# Altium PCB YarnControl_Driver_v1.1.PcbDoc
Units mm, origin at the board's own origin, x right, y up, seen from the top; angles counter-clockwise.
Board outline 80 x 60 mm, 2 copper layers (Top Layer, Bottom Layer); 133 components, 96 nets, 439 pads, 185 vias.
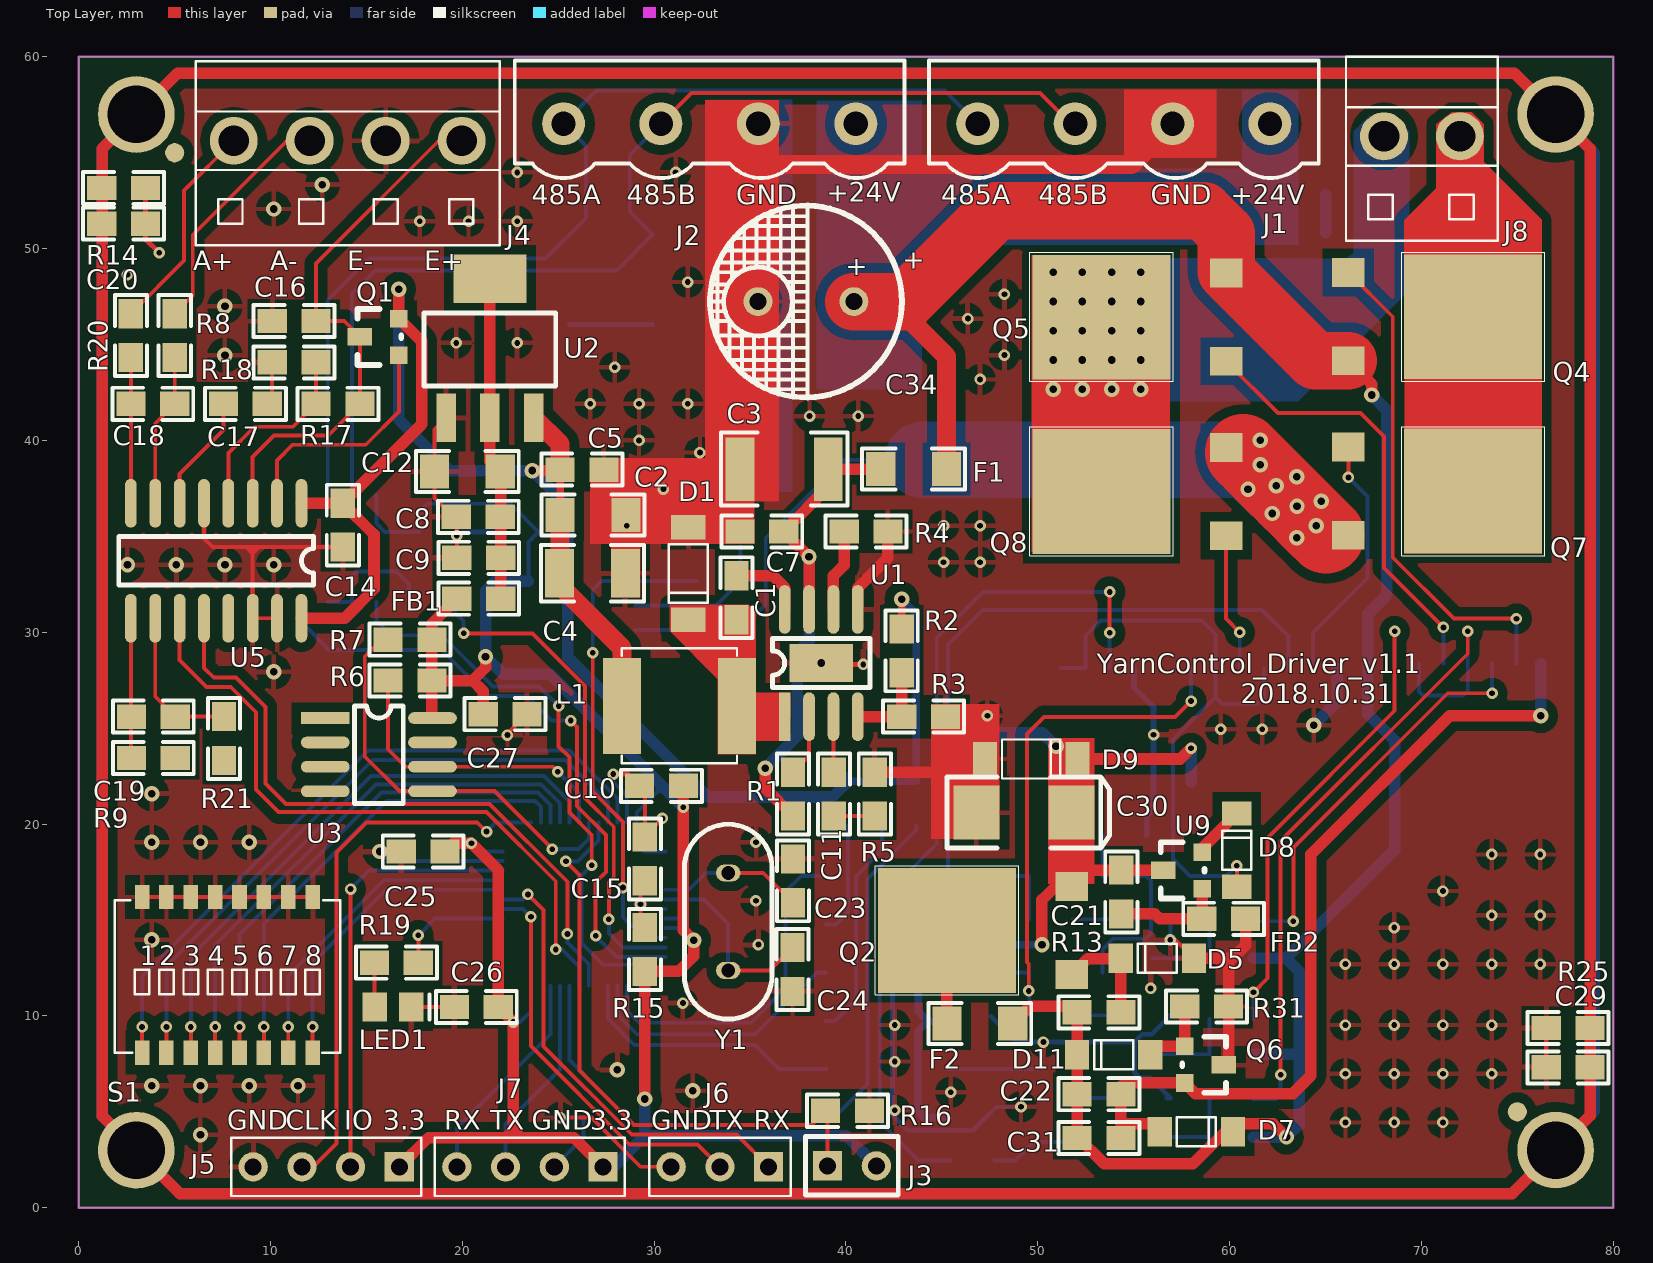
[diagram p0: Top Layer view]
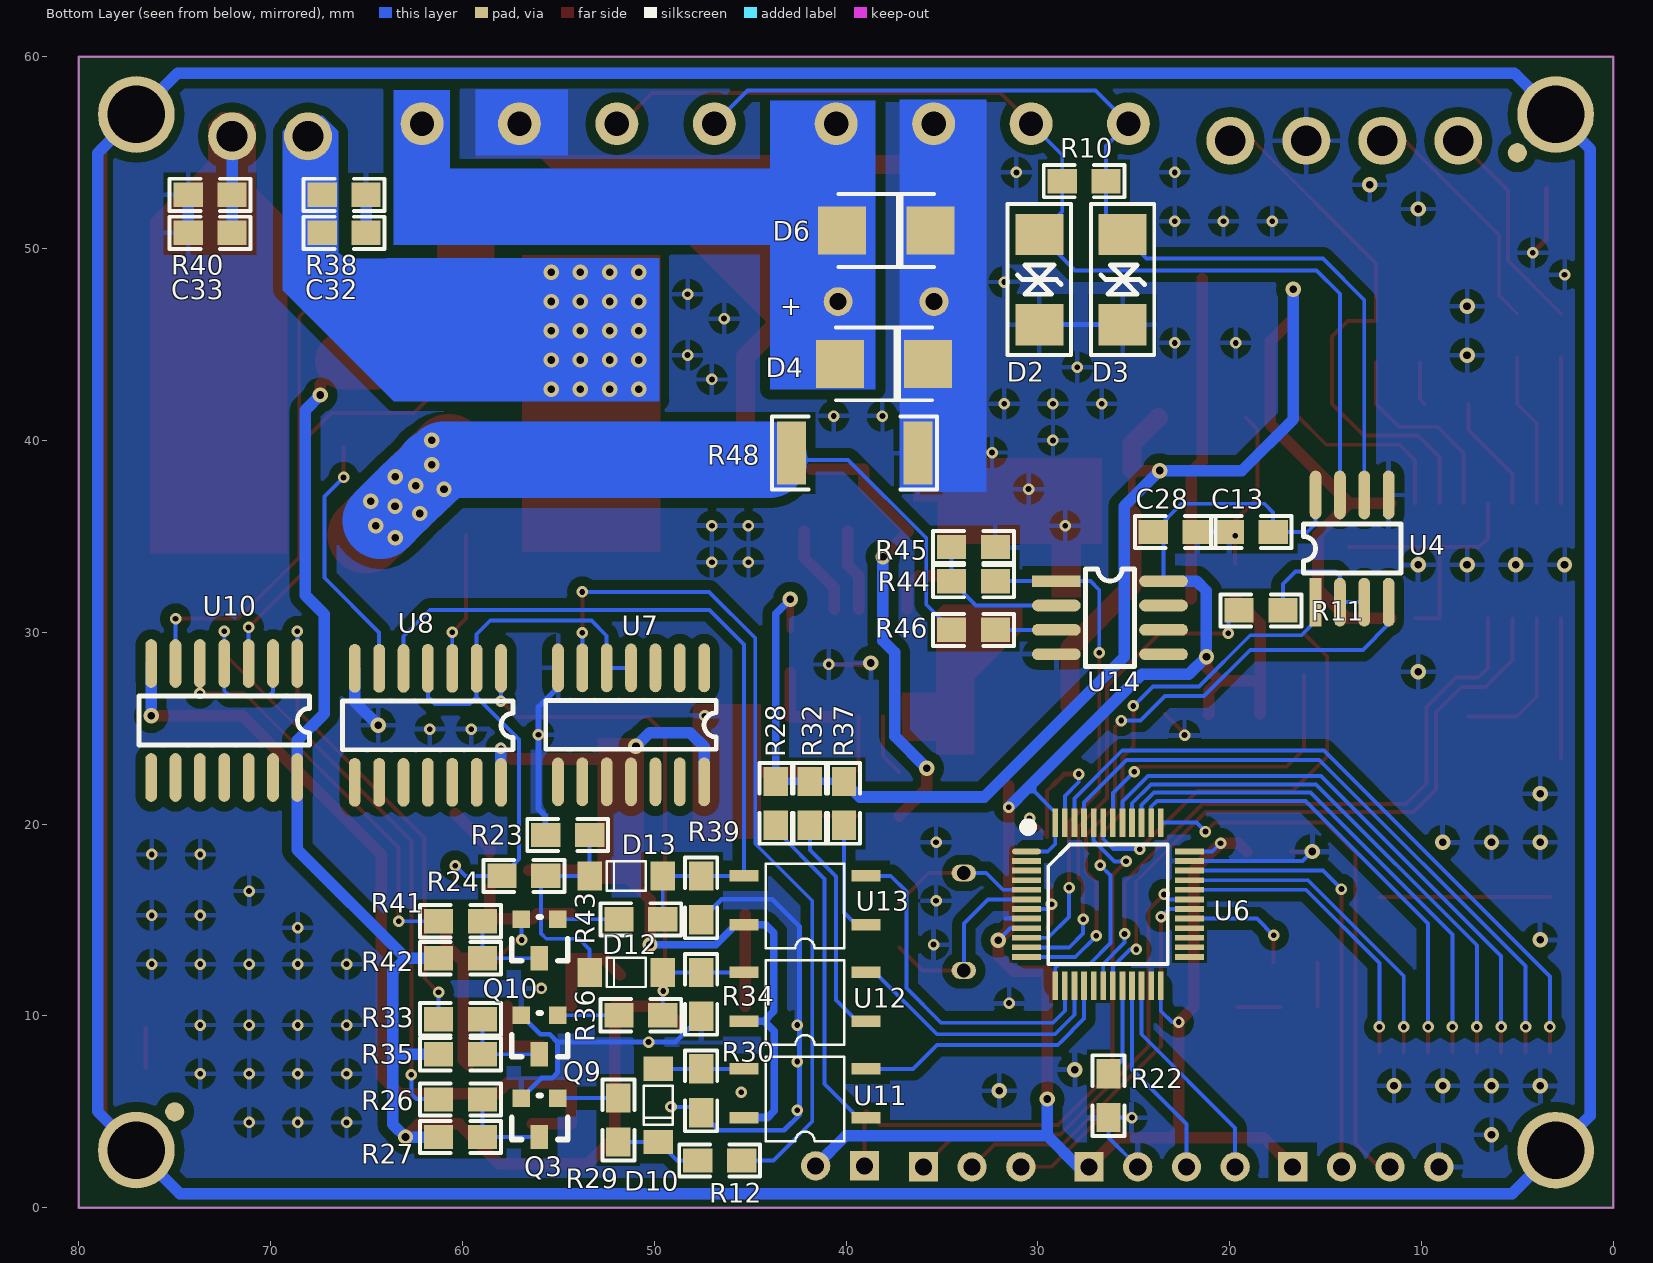
[diagram p1: Bottom Layer view, seen from below]
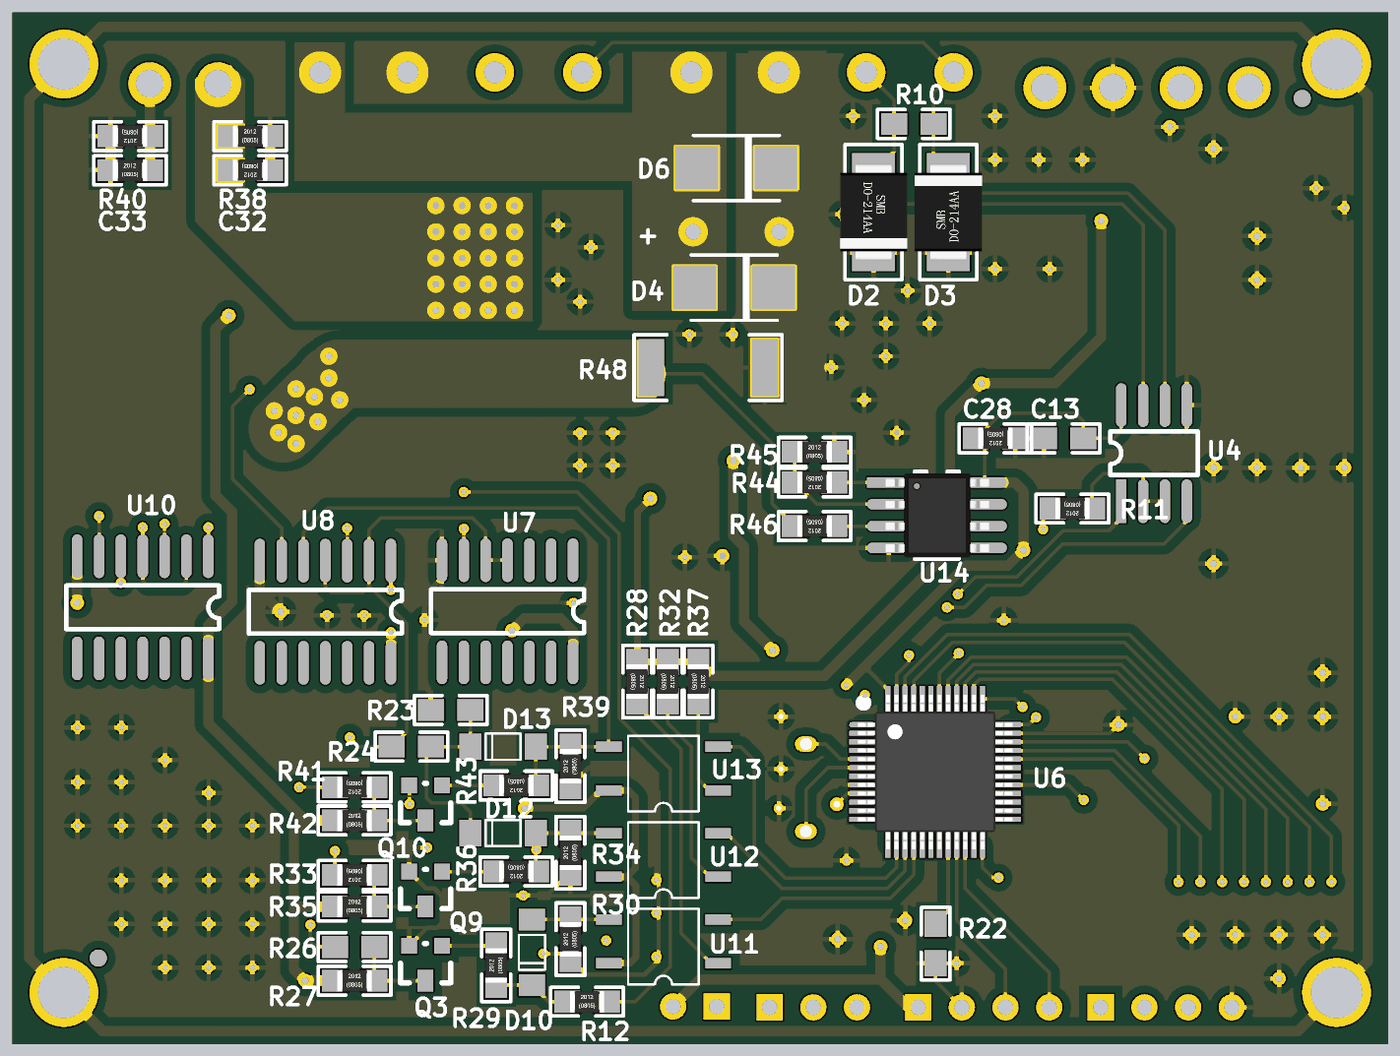
[diagram p2: 3D render of the assembled board from below, using the file's embedded part models]

## Layer stack, top to bottom
Top Layer: signal copper 0.0356
Dielectric: dielectric 0.32, FR-4, Dk 4.8
Bottom Layer: signal copper 0.0356

## Board outline
0,0 80,0 80,60 0,60

## Design rules (kind name [scope] priority, off if disabled: settings)
Clearance LQFP_48 [(HasFootprint('LQFP_48'))] p1: gap=0.178
Clearance poly [inpoly] p2: gap=0.508
Clearance [All] p3: gap=0.203
Height [All] p1: minheight=0 maxheight=50 prefheight=12.7
HoleSize [All] p1: absolutevalues=TRUE maxlimit=4 minlimit=0.025 maxpercent=80.000 minpercent=20.000
MinimumSolderMaskSliver [All] p1: minsoldermaskwidth=0
PolygonConnect [All] p1: connectstyle=Relief reliefconductorwidth=0.254 reliefentries=4 polygonreliefangle="90 Angle"
RoutingVias [All] p1: holewidth=0.711 width=1.27 viastyle="Through Hole" minholewidth=0.3 minwidth=0.6 maxholewidth=0.711 maxwidth=1.27
SilkToSilkClearance [All] p1: silktosilkclearance=0
SilkscreenOverComponentPads [All] p1: minsilkscreentomaskgap=0
SolderMaskExpansion [All] p1: expansion=0.102
Width [All] p1: maxlimit=5 minlimit=0.203 preferedwidth=0.203
23 further rules are at their usual default settings.

## Classes and differential pairs
component class YarnControl_motor_v1.1: C20 C21 C22 C29 C30 C31 C32 C33 C34 D4 D5 D6 D7 D8 D9 D10 D11 D12 D13 F2 FB2 J8 Q2 Q3 Q4 Q5 Q6 Q7 Q8 Q9 Q10 R12 R13 R14 R23 R24 R25 R26 R27 R28 R29 R30 R31 R32 R33 R34 R35 R36 R37 R38 R39 R40 R41 R42 R43 R44 R45 R46 R48 U7 U8 U9 U10 U11 U12 U13 U14
component class YarnControl_Driver_v1.1: C1 C2 C3 C4 C5 C7 C8 C9 C10 C11 C12 C13 C14 C15 C16 C17 C18 C19 C23 C24 C25 C26 C27 C28 D1 D2 D3 F1 FB1 J1 J2 J3 J4 J5 J6 J7 L1 LED1 Q1 R1 R2 R3 R4 R5 R6 R7 R8 R9 R10 R11 R15 R16 R17 R18 R19 R20 R21 R22 S1 U1 U2 U3 U4 U5 U6 Y1

## Components (designator, comment, footprint, x,y, rotation, side; value= is the part's Value field where it differs from the comment)
C1 "0.1uF" 0805#1 34.29,32.944 r270 top
C2 "22uF" 1206 28.524,36.119 r180 top
C3 "47uF" 1812 36.779,38.506 r180 top
C4 "47uF" 1210 28.499,33.071 r180 top
C5 "0.1uF" 0805#1 27.381,38.481 r180 top
C7 "0.1uF" 0805#1 36.754,35.255 r180 top
C8 "10uF" 0805#1 19.685,36.017 r0 top
C9 "0.1uF" 0805#1 19.71,33.884 r0 top
C10 "0.1uF" 0805#2 30.378,21.996 r180 top
C11 "150pF" 0805#1 39.37,22.708 r270 top
C12 "22uF" 1206 21.971,38.379 r180 top
C13 "0.1uF" 0805#1 20.015,35.23 r180 bottom
C14 "1uF" 0805#1 13.767,34.442 r90 top
C15 "0.1uF" 0805#1 29.515,19.329 r270 top
C16 "1uF" 0805#1 10.084,46.228 r0 top
C17 "1uF" 0805#1 7.544,41.91 r0 top
C18 "0.1uF" 0805#1 5.004,41.91 r180 top
C19 "0.1uF" 0805#1 2.743,25.603 r0 top
C20 "10nF" 0805#2 2.337,51.308 r0 top
C21 "10uF" 0805#1 54.356,17.602 r270 top
C22 "10nF" 0805#1 52.045,5.918 r0 top
C23 "22pF" 0805#2 37.236,17.043 r270 top
C24 "22pF" 0805#2 37.211,12.421 r90 top
C25 "0.1uF" 0805#2 17.958,18.567 r0 top
C26 "0.1uF" 0805#2 20.726,10.465 r0 top
C27 "0.1uF" 0805#2 22.225,25.73 r180 top
C28 "0.1uF" 0805#2 22.835,35.23 r0 bottom
C29 "10nF" 0805#2 77.648,7.315 r180 top
C30 "100uF" CA6032-C 49.276,20.599 r0 top
C31 "22uF" 0805#2 53.188,3.632 r180 top
C32 "10nF" 0805#2 66.167,50.825 r0 bottom
C33 "10nF" 0805#2 73.152,50.825 r180 bottom
C34 "1000uF/35V" CAP-5MM 40.411,47.244 r180 top
D1 "1N5819" Diode_TP2 31.775,35.484 r270 top
D2 "SMBJ6.5CA" SMBJ_DO-214 29.921,48.387 r270 bottom
D3 "SMBJ6.5CA" SMBJ_DO-214 25.578,48.387 r90 bottom
D4 "SMCJ24A" DO-214AA/SMB 38.024,43.993 r180 bottom
D5 "ZMM6V2" DIDODE_LL-34 56.236,13.005 r180 top
D6 "SMCJ24A" DO-214AA/SMB 37.897,50.952 r180 bottom
D7 "ZMM6V2" DIDODE_LL-34 58.268,3.962 r0 top
D8 "1N4148" DIDODE_LL-34 60.376,18.644 r90 top
D9 "SMAJ5.0A" Diode_TP2 47.244,23.393 r0 top
D10 "1N4148" DIDODE_LL-34 49.784,5.334 r270 bottom
D11 "ZMM6V2" DIDODE_LL-34 53.95,7.976 r180 top
D12 "1N4148" DIDODE_LL-34 51.46,12.268 r0 bottom
D13 "1N4148" DIDODE_LL-34 51.46,17.297 r0 bottom
F1 "FUSE" 1206 45.237,38.506 r180 top
F2 "FUSE" 1206 45.263,9.601 r0 top
FB1 "FERRITE" 0805#1 21.996,31.75 r180 top
FB2 "FERRITE" 0805#2 59.69,15.062 r0 top
J1 "SH-4" J5.08_4(NoEar) 54.483,56.515 r180 top
J2 "SH-4" J5.08_4(NoEar) 32.893,56.515 r180 top
J3 "Jumper" J254-2 39.04,2.184 r0 top
J4 "SH-4" CH3.96-4P 14.021,55.626 r0 top
J5 "SH-4" J254-4 16.713,2.134 r180 top
J6 "SH-3" J2.54-3 33.426,2.134 r180 top
J7 "SH-4" J254-4 27.33,2.134 r180 top
J8 "SH-2" CH3.96-2P 70.028,55.855 r0 top
L1 "4.7uH" Inductance6*6 31.318,26.162 r180 top
LED1 "GREEN" LED 16.383,10.465 r0 top
Q1 "S8550" 901X_SOT-23 14.656,45.415 r90 top
Q2 "2SD1760" TO-252-2L 48.514,14.453 r90 top
Q3 "MMBT3904" SOT-23 55.982,3.683 r0 bottom
Q4 "NCE40P70K" TO-252 72.695,46.457 r270 top
Q5 "NCE40P70K" TO-252 53.315,46.431 r90 top
Q6 "MMBT2907A" 901X_SOT-23 59.69,7.442 r270 top
Q7 "NCE6075" TO-252 72.695,37.363 r270 top
Q8 "NCE6075" TO-252 53.315,37.338 r90 top
Q9 "MMBT3904" SOT-23 55.982,8.001 r0 bottom
Q10 "MMBT3904" SOT-23 55.982,13.005 r0 bottom
R1 "100K" 0805#1 37.236,22.708 r270 top
R2 "210K" 0805#1 42.901,30.175 r270 top
R3 "40.2K" 0805#1 45.187,25.603 r180 top
R4 "100K" 0805#1 42.189,35.255 r180 top
R5 "100K" 0805#1 41.504,22.708 r270 top
R6 "10K" 0805#1 16.129,27.483 r0 top
R7 "10K" 0805#1 16.129,29.616 r0 top
R8 "1K" 0805#2 5.004,45.466 r90 top
R9 "1K" 0805#2 3.886,23.444 r0 top
R10 "120R" 0805#1 28.727,53.518 r180 bottom
R11 "1K" 0805#2 18.364,31.14 r0 bottom
R12 "4.7K" 0805#2 46.584,2.464 r180 bottom
R13 "5.6K" 0805#2 53.188,10.185 r0 top
R14 "1M" 0805#2 2.337,53.162 r180 top
R15 "10K" 0805#1 29.515,14.605 r270 top
R16 "10K" 0805#1 38.938,5.055 r0 top
R17 "20K" 0805#1 12.37,41.91 r0 top
R18 "8.2K" 0805#1 12.37,44.069 r180 top
R19 "1K" 0805#1 15.418,12.776 r0 top
R20 "1K" 0805#1 2.718,44.323 r90 top
R21 "1K" 0805#1 7.569,25.603 r270 top
R22 "10K" 0805#1 26.314,4.699 r90 bottom
R23 "10K" 0805#1 55.651,19.431 r180 bottom
R24 "10K" 0805#1 55.651,17.297 r0 bottom
R25 "1M" 0805#1 76.505,9.373 r0 top
R26 "10K" 0805#1 58.953,5.639 r0 bottom
R27 "10K" 0805#2 60.096,3.683 r180 bottom
R28 "510R" 0805#2 43.663,21.082 r270 bottom
R29 "10K" 0805#2 51.867,4.572 r90 bottom
R30 "510R" 0805#2 47.549,6.096 r90 bottom
R31 "5.6K" 0805#2 58.801,10.49 r180 top
R32 "510R" 0805#2 41.885,21.082 r270 bottom
R33 "10K" 0805#2 60.096,9.83 r0 bottom
R34 "4.7K" 0805#2 47.549,11.125 r90 bottom
R35 "10K" 0805#2 60.096,8.001 r180 bottom
R36 "10K" 0805#2 50.698,10.033 r0 bottom
R37 "510R" 0805#2 40.107,21.082 r270 bottom
R38 "1M" 0805#2 66.167,52.807 r180 bottom
R39 "4.7K" 0805#2 47.549,16.154 r90 bottom
R40 "1M" 0805#2 73.152,52.807 r0 bottom
R41 "10K" 0805#2 60.096,14.935 r0 bottom
R42 "10K" 0805#2 60.096,13.005 r180 bottom
R43 "10K" 0805#2 50.698,15.037 r0 bottom
R44 "10K" 0805#2 33.35,32.664 r0 bottom
R45 "1K" 0805#2 33.35,34.442 r180 bottom
R46 "1K" 0805#2 33.35,30.124 r0 bottom
R48 "R100" 2512 39.548,39.345 r0 bottom
S1 "SW-CH8" SWITCH_8 7.747,12.141 r0 top
U1 "MP1584" MP1584 38.71,28.397 r90 top
U2 "AMS1117" TO-223 21.438,44.806 r0 top
U3 "SMEC98SP" SO-8#1 15.646,23.622 r0 top
U4 "SP3485" SO-8#1 13.614,34.366 r90 bottom
U5 "HX711" SO-16 11.608,36.728 r270 top
U6 "STM32F103C8T6" LQFP_48 26.34,15.824 r180 bottom
U7 "74VHC00" SO-14 47.396,28.143 r270 bottom
U8 "74VHC08" SO-14 57.988,28.118 r270 bottom
U9 "MAX809" SOT-23 56.54,17.602 r90 top
U10 "74VHC00" SO-14 68.605,28.372 r270 bottom
U11 "EL357N" EL357N 42.139,5.969 r0 bottom
U12 "EL357N" EL357N 42.139,10.998 r0 bottom
U13 "EL357N" EL357N 42.139,16.027 r0 bottom
U14 "LM358" SO-8#2 29.032,32.664 r180 bottom
Y1 "8M" XTAL 33.858,12.37 r90 top

## Footprints (in the part's own frame and the unit in brackets; to place one, negate y for a bottom-side part, rotate by r counter-clockwise, add the part's x,y. Pads: shape width x height; smd on the part's side, far side on the other; paste and mask are expansions set on the pad)
0805#1 [mil]
  rect 60x50 smd: 1(0,0) 2(90,0)
  silkscreen extent -38,-33 128,33
0805#2 [mil]
  rect 60x50 smd: 1(-45,0) 2(45,0)
  silkscreen extent -83,-33 83,33, body extent -39,-25 39,24, height 18
901X_SOT-23 [mil]
  rect 36x50 smd: 1(0,0)
  rect 36x36 smd: 2(-38,-80) 3(37,-80)
  silkscreen extent -58,-85 57,5
1206 [mil]
  rect 60x70 smd: 1(0,0) 2(135,0)
  silkscreen extent -38,-42 173,42
1210 [mil]
  rect 60x100 smd: 1(0,0) 2(135,0)
  silkscreen extent -38,-58 173,58
1812 [mm]
  rect 1.5x3.3 smd: 1(-2.3,0) 2(2.3,0)
  silkscreen extent -3.3,-1.91 3.3,1.91
2512 [mm]
  rect 1.5x3.3 smd: 1(-3.3,0) 2(3.3,0)
  silkscreen extent -4.3,-1.91 4.3,1.91
CA6032-C [mm]
  rect 2.4x2.8 smd: 1(2.48,0) 2(-2.48,0)
  silkscreen extent -4.01,-1.85 4.47,1.85, body extent -3.05,-1.68 3.05,1.67, height 2.7
CAP-5MM [mm]
  round 1.5 hole 0.9: 1(0,0) 2(5,0)
  silkscreen extent -2.5,-5 7.5,5
CH3.96-2P [mm]
  round 2.5 hole 1.6: 1(-1.98,0) 2(1.98,0)
  silkscreen extent -3.96,-5.45 3.96,4.15
CH3.96-4P [mm]
  round 2.5 hole 1.6: 1(-5.94,0) 2(-1.98,0) 3(1.98,0) 4(5.94,0)
  silkscreen extent -7.92,-5.45 7.92,4.15
DIDODE_LL-34 [mil]
  rect 50x60 smd: 1(-75,0) 2(75,0)
  silkscreen extent -40,-30 40,30
Diode_TP2 [mil]
  rect 50x70 smd: 1(0,0) 2(190,0)
  silkscreen extent 35,-40 155,40
DO-214AA/SMB [mm]
  rect 2.5x2.5 smd: 1(-2.3,0) 2(2.3,0)
  silkscreen extent -2.5,-1.9 2.5,1.9
EL357N [mm]
  rect 1.5x0.6 smd: 1(-3.175,1.27) 2(-3.175,-1.27) 3(3.175,-1.27) 4(3.175,1.27)
  silkscreen extent -2.05,-1.9 2.05,2.5
Inductance6*6 [mm]
  rect 2x5 smd: 1(-3,0) 2(3,0)
  silkscreen extent -3,-3 3,3
J2.54-3 [mil]
  rect 60x60 hole 35: 1(-100,0)
  round 60 hole 35: 2(0,0) 3(100,0)
  silkscreen extent -145,-60 145,60
J5.08_4(NoEar) [mil]
  round 88 hole 50: 1(300,0) 2(100,0) 3(-100,0) 4(-300,0)
  silkscreen extent -400,-130 400,111
J254-2 [mil]
  rect 60x60 hole 35: 1(0,0)
  round 60 hole 35: 2(100,0)
  silkscreen extent -45,-60 145,60
J254-4 [mil]
  rect 60x60 hole 35: 1(0,0)
  round 60 hole 35: 2(100,0) 3(200,0) 4(300,0)
  silkscreen extent -45,-60 345,60
LED [mm]
  rect 1.3x1.5 smd: 1(-0.95,0) 2(0.95,0)
  silkscreen extent 1.9,-0.65 1.9,0.65
LQFP_48 [mm]
  oval 1.5x0.3 smd: 1(-4.25,2.75)
  rect 1.5x0.3 smd: 2(-4.25,2.25) 3(-4.25,1.75) 4(-4.25,1.25) 5(-4.25,0.75) 6(-4.25,0.25) 7(-4.25,-0.25) 8(-4.25,-0.75) 9(-4.25,-1.25) 10(-4.25,-1.75) 11(-4.25,-2.25) 12(-4.25,-2.75) 25(4.25,-2.75) 26(4.25,-2.25) 27(4.25,-1.75) 28(4.25,-1.25) 29(4.25,-0.75) 30(4.25,-0.25) 31(4.25,0.25) 32(4.25,0.75) 33(4.25,1.25) 34(4.25,1.75) 35(4.25,2.25) 36(4.25,2.75)
  rect 0.3x1.5 smd: 13(-2.75,-4.25) 14(-2.25,-4.25) 15(-1.75,-4.25) 16(-1.25,-4.25) 17(-0.75,-4.25) 18(-0.25,-4.25) 19(0.25,-4.25) 20(0.75,-4.25) 21(1.25,-4.25) 22(1.75,-4.25) 23(2.25,-4.25) 24(2.75,-4.25) 37(2.75,4.25) 38(2.25,4.25) 39(1.75,4.25) 40(1.25,4.25) 41(0.75,4.25) 42(0.25,4.25) 43(-0.25,4.25) 44(-0.75,4.25) 45(-1.25,4.25) 46(-1.75,4.25) 47(-2.25,4.25) 48(-2.75,4.25)
  silkscreen extent -4.33,-3.11 3.11,4.18, body extent -4.5,-4.5 4.5,4.5, height 1.6
MP1584 [mil]
  rect 78.74x129.92 smd: 0(0,0)
  rect 100x24 smd: 1(-110,75)
  oval 100x24 smd: 2(-110,25) 3(-110,-25) 4(-110,-75) 5(110,-75) 6(110,-25) 7(110,25) 8(110,75)
  silkscreen extent -50,-100 50,100
SMBJ_DO-214 [mm]
  rect 2.16x2.5 smd: 1(-2.35,0) 2(2.35,0)
  silkscreen extent -3.94,-1.65 3.94,1.65, body extent -2.8,-1.95 2.8,1.95, height 2.5
SO-8#1 [mil]
  rect 100x24 smd: 1(-110,75)
  oval 100x24 smd: 2(-110,25) 3(-110,-25) 4(-110,-75) 5(110,-75) 6(110,-25) 7(110,25) 8(110,75)
  silkscreen extent -50,-100 50,100
SO-8#2 [mil]
  rect 100x24 smd: 1(0,0)
  oval 100x24 smd: 2(0,-50) 3(0,-100) 4(0,-150) 5(220,-150) 6(220,-100) 7(220,-50) 8(220,0)
  silkscreen extent 60,-175 160,25, body extent -7,-172 229,21, height 67
SO-14 [mil]
  oval 100x24 smd: 1(0,0) 2(0,-50) 3(0,-100) 4(0,-150) 5(0,-200) 6(0,-250) 7(0,-300) 8(234,-300) 9(234,-250) 10(234,-200) 11(234,-150) 12(234,-100) 13(234,-50) 14(234,0)
  silkscreen extent 67,-325 167,25
SO-16 [mil]
  oval 100x24 smd: 1(0,0) 2(0,-50) 3(0,-100) 4(0,-150) 5(0,-200) 6(0,-250) 7(0,-300) 8(0,-350) 9(236,-350) 10(236,-300) 11(236,-250) 12(236,-200) 13(236,-150) 14(236,-100) 15(236,-50) 16(236,0)
  silkscreen extent 68,-375 168,25
SOT-23 [mil]
  rect 36x36 smd: 1(-38,-80) 2(37,-80)
  rect 36x50 smd: 3(0,0)
  silkscreen extent -58,-85 57,5
SWITCH_8 [mm]
  rect 0.76x1.27 smd: 1(-4.445,-4.06) 2(-3.175,-4.06) 3(-1.905,-4.06) 4(-0.635,-4.06) 5(0.635,-4.06) 6(1.905,-4.06) 7(3.175,-4.06) 8(4.445,-4.06) 9(4.445,4.06) 10(3.175,4.06) 11(1.905,4.06) 12(0.635,4.06) 13(-0.635,4.06) 14(-1.905,4.06) 15(-3.175,4.06) 16(-4.445,4.06)
  silkscreen extent -5.88,-4.06 5.88,3.88
TO-223 [mil]
  rect 150x100 smd: 0(0,142.5)
  rect 40x100 smd: 1(-90,-142.5) 2(0,-142.5) 3(90,-142.5)
  silkscreen extent -135,-78 135,72
TO-252 [mm]
  rect 6.5x7.2 smd: 1(0,0)
  rect 1.5x1.7 smd: 2(-2.3,-6.5) 3(2.3,-6.5)
  silkscreen extent -3.35,-3.73 3.38,3.73
TO-252-2L [mm]
  rect 1.5x1.7 smd: 1(-2.3,-3.25) 3(2.3,-3.25)
  rect 6.5x7.2 smd: 2(0,3.25)
  silkscreen extent -3.35,-0.48 3.38,6.98
XTAL [mil]
  oval 35x50 hole 28: 1(0,0) 2(200,0)
  silkscreen extent -100,-90 300,90, body extent -121,-93 319,91, height 143

## Part data
C1 C2 C3 C7 C11 C12 C14 C16 C17 C18 C19 C20 C21 C22 C23 C24 C29 C31 C32 C33: library part CAP, "电容"
C4 C5 C8 C9: library part Cap0805
C10 C13 C15 C25 C26 C27 C28: library part Cap, "Capacitor"
C30: library part CapAEC*4
C34: library part "Cap Pol1", "Polarized Capacitor (Radial)"
D1: library part Diode, "二极管"
D2 D3 D4 D6 D9: library part TVS
D5 D7 D11: library part "D Zener", "Zener Diode"
D8 D10 D12 D13: library part Diode, "Default Diode"
F1 F2: "保险丝"
L1: library part Inductor, "电感"
LED1: library part LED2, "Typical RED, GREEN, YELLOW, AMBER GaAs LED"
Q1 Q6: library part PNP
Q3 Q9 Q10: library part S8050
Q4 Q5: library part MOSFET-P, "P-Channel MOSFET"
Q7 Q8: library part MOSFET-N, "N-Channel MOSFET"
R1 R2 R3 R4 R5 R8 R9 R12 R13 R14 R16 R17 R18 R19 R20 R21 R23 R24 R25 R26 R27 R28 R29 R30 R31 R32 R33 R34 R35 R36 R37 R38 R39 R40 R41 R42 R43 R44 R45 R46 R48: library part RES, "电阻"
R6 R7 R10 R11 R15 R22: library part Res2, "Resistor"
S1: "拨码开关CH8"
U4: "485"
U8: library part 74HC08
U11 U12 U13: library part TLP521
Y1: library part XTAL, "Crystal Oscillator"

## Free pads (board coordinates)
  round 4 hole 3: 0(3,3) 0(3,57) 0(77,3) 0(77,57)
  round 1 smd: 0(5,55) 0(75,5)
  round 1 smd far side: 0(5,55) 0(75,5)

## Via types
v1: diameter 0.6, hole 0.3, Top Layer to Bottom Layer, 118 vias
v2: diameter 0.8, hole 0.4, Top Layer to Bottom Layer, 67 vias

## Nets (pads, with @x,y where several pads share a name; then routed paths per layer and width w, separated by ;. In a path a pad name is that pad's centre, name@x,y a point inside that pad or via, vN(x,y) a via of type N, cw(c..) or ccw(c..) an arc to the next point about the centre after c; other vN are vias at no path point)
485_DE: R11.2 U6.11 | length 25.8
  Top Layer w0.203: v1(20.066,29.947) 23.647,29.947 26.391,27.203 26.391,21.361 27.889,19.863 27.889,17.221 27.635,16.967 v1(27.635,15.037)
  Bottom Layer w0.203: R11.2 20.066,30.582 v1(20.066,29.947) ; v1(27.635,15.037) 27.635,14.3 28.361,13.574 U6.11
485_RX: U4.1 U6.13 | length 30
  Top Layer w0.203: v1(25.019,26.162) 25.019,24.054 25.578,23.495 25.578,20.599 26.746,19.431 v1(26.746,17.856)
  Bottom Layer w0.203: U4.1 15.519,30.582 16.256,29.845 18.923,29.845 21.59,27.178 24.003,27.178 v1(25.019,26.162) ; v1(26.746,17.856) 26.213,17.323 26.213,13.792 27.337,12.668 28.912,12.668 29.09,12.49 U6.13
485_TX: U4.4 U6.12 | length 33.5
  Top Layer w0.203: v1(25.654,25.4) 25.984,25.07 25.984,20.93 27.483,19.431 27.483,17.501 26.949,16.967 v1(26.949,14.173)
  Bottom Layer w0.203: U4.4 11.709,30.429 13.056,29.083 18.923,29.083 21.336,26.67 23.368,26.67 24.638,25.4 v1(25.654,25.4) ; v1(26.949,14.173) 28.048,13.074 U6.12
+3.3V: C10.1 C13.2 C25.2 C26.2 C27.2 C28.2 FB1.2 J3.2 J5.1 J7.1 R6.2 R7.2 R15.2 U3.8 U4.8 U6.1 U6.9 U6.24 U6.36 U6.48 U14.8 | length 125.1
  Top Layer w0.203: U3.8@18.415,25.756 U3.8@18.44,25.73 ; C27.2 C27.2@21.26,25.73
  Top Layer w0.6: J5.1 18.237,3.658 22.276,3.658 ; R7.2@18.415,29.947 R7.2 ; U3.8@18.44,25.756 18.415,25.756 R6.2 ; C25.2 19.533,18.999 v1(20.472,18.999) 21.869,17.602 C26.2 v1(22.657,9.677) 22.657,4.039 ; FB1.2 18.415,30.455 R7.2 ; C27.2@21.057,25.756 C27.2 21.082,26.924 20.523,27.483 ; v2(21.209,28.727) 21.209,28.169 20.523,27.483 ; 23.038,3.658 22.657,4.039 ; J7.1 25.806,3.658 22.276,3.658 ; v2(29.515,5.664) R15.2 31.267,12.319 32.055,13.106 v2(32.055,13.945) 31.521,14.478 v1(31.521,20.879) C10.1 ; R6.2 20.523,27.483 ; R6.2 R7.2 ; 22.276,3.658 22.657,4.039
  Bottom Layer w0.203: U4.8 15.519,35.662 15.951,35.23 C13.2 17.729,36.246 18.186,36.703 22.504,36.703 C28.2 23.444,34.696 U14.8 ; v1(20.472,18.999) 20.904,18.567 U6.36@22.083,18.567 ; 23.012,9.677 23.59,10.255 U6.24 ; 30.175,22.186 30.175,21.692 ; 30.455,21.971 30.442,21.958 30.175,21.692 ; U6.9 31.425,14.574 v2(32.055,13.945) ; U6.1 29.483,18.574 29.09,18.967 U6.48 29.09,20.606 30.175,21.692 ; 30.658,21.692 30.175,21.692
  Bottom Layer w0.6: U14.8 21.717,32.664 21.209,32.156 v2(21.209,28.727) 22.123,27.813 24.587,27.813 30.442,21.958 v1(31.521,20.879) ; J7.1 27.889,2.134 29.515,3.759 40.005,3.759 J3.2 ; 29.515,3.937 v2(29.515,5.664)
+5V: C2.2 C4.2 C5.2 C14.2 L1.2 Q1.3 R2.1 R28.1 R32.1 R37.1 U2.3 U5.1 U5.16 | length 105
  Top Layer w0.4: C5.2@24.765,38.481 C5.2 C2.2 C4.2@25.095,33.376 ; L1.2 L1.2@28.321,26.165 ; R2.1 v2(42.901,31.725)
  Top Layer w0.6: U5.16 13.868,30.734 15.392,32.258 15.392,35.103 C14.2 ; U5.1 C14.2 ; v2(16.688,47.879) Q1.3 17.882,45.161 17.882,40.843 C14.2 ; v2(23.647,38.43) 25.044,38.43 C5.2
  Top Layer w1: U2.3 25.095,39.814 C5.2 ; C2.2 25.095,32.408 28.318,29.185 L1.2
  Bottom Layer w0.4: R37.1@40.107,22.504 R37.1 R32.1 R28.1 43.663,30.963 v2(42.901,31.725)
  Bottom Layer w0.6: v2(16.688,47.879) 16.688,41.097 19.355,38.43 v2(23.647,38.43) 25.502,36.576 25.502,28.702 32.791,21.412 39.294,21.412 R37.1
+24V: C22.1 C31.2 C34.1 D4.1 D6.1 D7.2 D11.2 F1.1 F2.2 J1.4 J2.4 Q4.3 Q5.3 R13.1 R27.1 R35.1 R42.1 U10.14 | length 118.2
  Top Layer w0.6: F2.2 49.581,10.49 52.045,10.49 52.045,3.708 53.467,2.286 58.09,2.286 60.173,4.369 62.281,4.369 v2(62.967,3.683) ; Q4.3 67.412,42.94 v2(67.412,42.367)
  Top Layer w1: C34.1 42.367,47.244 45.237,44.374 F1.1
  Top Layer w3: C34.1 43.104,47.244 47.828,51.968 58.649,51.968 59.815,50.802 59.815,48.796 64.454,44.157 Q4.3
  Bottom Layer w0.6: R27.1 v2(62.967,3.683) 63.627,4.343 63.627,7.976 ; R35.1 63.602,8.001 63.627,7.976 ; R42.1 62.941,13.005 ; v2(67.412,42.367) 68.199,41.58 68.199,31.928 67.208,30.937 67.208,25.756 68.605,24.359 U10.14 68.605,18.669 62.941,13.005 ; 62.941,13.005 63.627,12.319 63.627,7.976
BOOT0: J3.1 R16.1 U6.44 | length 31.5
  Top Layer w0.203: v1(25.4,18.059) 26.111,17.348 26.111,7.163 28.956,4.318 38.202,4.318 R16.1 39.04,4.953 J3.1
  Bottom Layer w0.203: v1(25.4,18.059) 26.01,18.059 27.09,19.14 U6.44
BOOT1: R22.2 U6.20 | length 4.9
  Bottom Layer w0.203: U6.20 25.59,7.71 R22.2
BT_RXD: J7.4 U6.22 | length 11.5
  Bottom Layer w0.203: J7.4 19.71,4.166 24.59,9.045 U6.22
BT_TXD: J7.3 U6.21 | length 10.6
  Bottom Layer w0.203: J7.3 22.25,4.369 25.09,7.208 U6.21
EARTH: C20.1 C29.1 pad.0@3,3 pad.0@3,57 pad.0@77,3 pad.0@77,57 R14.2 R25.2 | length 525.5
  Top Layer w0.6: 1.219,4.781 5.263,0.737 74.737,0.737 78.791,4.791 78.791,55.209 74.843,59.157 5.156,59.157 3,57 1.219,55.219 1.219,4.781
  Bottom Layer w0.6: 1.194,4.806 3,3 5.263,0.737 74.737,0.737 79.019,5.019 79.019,54.981 74.843,59.157 5.157,59.157 1.194,55.194 1.194,4.806
ENA: U6.16 U11.2 | length 15.9
  Bottom Layer w0.203: U6.16 27.59,9.854 ; 28.8,8.644 27.59,9.854 ; U11.2 36.5,7.239 35.255,8.484 28.96,8.484 27.59,9.854
GND: C2.1 C3.2 C4.1 C5.1 C7.2 C8.1 C9.1 C10.2 C12.2 C13.1 C14.1 C15.1 C16.1 C17.2 C20.2 C23.1 C24.1 C25.1 C26.1 C27.1 C28.1 C29.2 C30.2 C32.1 C33.1 C34.2 D1.1 D2.2 D3.1 D4.2 D5.1 D6.2 D9.1 FB2.2 J1.3 J2.3 J4.3 J5.4 J6.3 J7.2 LED1.2 Q3.2 Q6.1 Q9.2 Q10.2 R3.1 R4.1 R5.1 R14.1 R16.2 R18.2 R22.1 R23.1 R25.1 R30.1 R31.1 R34.1 R38.2 R39.1 R40.2 R45.2 R48.1 S1.9 S1.10 S1.11 S1.12 S1.13 S1.14 S1.15 S1.16 U1.0 U1.5 U2.1 U3.4 U4.5 U5.5 U5.14 U5.15 U6.8 U6.23 U6.35 U6.47 U7.7 U8.7 U14.4 | length 198.2
  Top Layer w0.203: S1.16 S1.15 S1.14 S1.13 S1.12 S1.11 S1.10 S1.9 ; U5.5 6.528,34.9 6.985,34.442 8.738,34.442 ; C17.2 10.084,42.164 R18.2 ; U5.15 U5.14 9.068,34.112 ; C14.1 9.398,34.442 ; v2(15.697,18.567) C25.1 ; LED1.2 C26.1 ; U2.1 18.542,40.576 C12.2 18.542,37.008 19.609,35.941 19.71,35.839 v1(19.71,35.027) C9.1 C9.1@19.71,33.579 ; v1(22.352,24.638) 22.352,24.714 C27.1 ; J7.2@24.79,1.549 J7.2 ; v1(25.095,4.699) 26.73,4.699 29.296,2.134 J6.3 J6.3@30.886,1.549 ; C5.1@27.851,38.951 28.524,38.278 C2.1 28.524,35.56 28.524,33.401 C4.1@28.499,33.376 ; C10.2 29.515,21.717 C15.1@29.515,19.38 ; C15.1 C15.1@29.515,19.38 ; v1(30.429,20.295) C15.1@29.515,19.38 ; C7.2@34.265,35.255 C7.2 C3.2@34.468,37.414 ; v1(56.909,13.957) 57.188,13.957 D5.1 ; 8.738,34.442 9.068,34.442 ; 8.738,34.442 9.068,34.112 ; 9.068,34.112 9.398,34.442 ; 9.068,34.112 9.068,34.442 ; 9.068,34.442 9.398,34.442
  Top Layer w0.254: R14.1 C20.2 3.48,50.495 v1(4.191,49.784) ; v1(27.864,22.606) 28.626,22.606 C10.2 ; U1.0@38.786,28.321 v1(40.894,28.321) ; C29.2 R25.1
  Top Layer w0.6: U1.5 40.615,32.309 42.189,33.884 R4.1 ; R5.1@41.605,22.708 44.933,22.708 45.187,22.962 R3.1 ; D5.1 60.147,13.005 60.833,13.691 FB2.2 ; Q6.1 59.944,7.696 R31.1 59.944,12.802
  Top Layer w1: 34.468,54.635 34.722,54.381 54.889,54.381 J1.3 ; R3.1 46.796,23.994 46.796,23.393 C30.2
  Bottom Layer w0.203: v2(15.697,18.567) 16.19,18.074 U6.35 ; J7.2 26.314,3.658 R22.1 v1(25.095,4.699) ; v1(27.864,22.606) 27.864,22.2 28.59,21.474 U6.47 ; U6.8 31.687,15.074 ; R30.1 47.854,5.258 v1(49.124,5.258) ; v1(56.909,13.957) 56.909,15.024 Q10.2
  Bottom Layer w0.254: C13.1 C28.1 ; D3.1 D2.2 ; R30.1 46.634,4.039 43.231,4.039 42.418,4.851 42.418,5.08 42.418,7.62 42.418,9.525 42.418,14.656 43.84,16.078 46.482,16.078 R39.1 ; R34.1 48.895,8.636 v1(50.292,8.636) 55.042,8.636 ; Q9.2@56.744,10.033 Q9.2 55.931,9.042 55.448,9.042 55.042,8.636 ; Q3.2@56.744,5.715 Q3.2 55.88,6.756 55.321,6.756 55.042,7.036 55.042,8.636
  Bottom Layer w0.3: U7.7 55.016,27.127 56.032,26.111 v1(56.032,24.663) 56.032,20.777 55.677,20.422 55.677,19.456 R23.1
  Bottom Layer w0.6: v2(64.389,25.146) 65.608,26.365 U8.7 ; C32.1 R38.2 ; C33.1 R40.2
  other v1: 66.04,4.445 68.58,4.445 71.12,4.445 42.545,5.08 45.466,6.02 66.04,6.985 68.58,6.985 71.12,6.985 73.66,6.985 42.545,7.62 42.545,9.525 66.04,9.525 68.58,9.525 71.12,9.525 73.66,9.525 31.496,10.668 55.88,11.43 66.04,12.7 68.58,12.7 71.12,12.7 73.66,12.7 76.2,12.7 35.433,13.716 68.58,14.605 73.66,15.24 76.2,15.24 35.306,16.002 71.12,16.51 73.66,18.415 76.2,18.415 35.306,19.05 59.538,24.943 61.697,24.943 47.371,25.654 45.085,33.655 46.99,33.655 28.575,35.56 45.085,35.56 46.99,35.56 30.48,37.465 32.385,39.37 29.21,40.005 38.1,41.275 40.64,41.275 26.67,41.91 29.21,41.91 31.75,41.91 46.99,43.18 27.94,43.815 48.26,44.45 19.685,45.085 22.86,45.085 46.355,46.355 48.26,47.625 31.75,48.26 2.54,48.641 17.78,51.435 20.32,51.435 22.86,51.435 22.86,53.975 31.115,53.975
  other v2: 6.35,3.81 32.004,6.096 3.81,6.35 6.35,6.35 8.89,6.35 11.43,6.35 28.067,7.188 3.81,13.97 3.81,19.05 6.35,19.05 8.89,19.05 3.81,21.59 10.16,27.94 38.71,28.397 2.54,33.528 5.08,33.528 7.62,33.528 10.16,33.528 7.62,44.45 7.62,46.99 10.16,52.07 12.7,53.34
IIC1_SCL: R6.1 U3.6 U6.42 | length 16.3
  Top Layer w0.203: R6.1@16.129,27.762 R6.1 16.129,23.901 17.043,22.987 U3.6 24.714,22.987 v1(24.968,22.733)
  Bottom Layer w0.203: v1(24.968,22.733) 26.09,21.611 U6.42
IIC1_SDA: R7.1 U3.5 U6.43 | length 21.7
  Top Layer w0.203: R7.1@16.129,29.947 14.91,28.727 14.91,23.52 16.713,21.717 U3.5 21.666,21.717 v1(24.689,18.694)
  Bottom Layer w0.203: v1(24.689,18.694) 26.06,18.694 26.59,19.224 U6.43
IN1: U6.15 U12.2 | length 14.1
  Bottom Layer w0.203: U6.15 28.09,10.061 29.108,9.042 35.255,9.042 38.481,12.268 U12.2
IN2: U6.14 U13.2 | length 18.1
  Bottom Layer w0.203: U6.14 28.59,10.268 29.214,9.644 35.044,9.644 36.855,11.455 36.855,16.485 37.668,17.297 U13.2
LED: R19.2 U6.29 | length 6.2
  Top Layer w0.203: R19.2 v1(17.704,14.199)
  Bottom Layer w0.203: v1(17.704,14.199) 18.579,15.074 U6.29
M1_1: C32.2 J8.1 Q5.1 Q8.1 R38.1
  other v2: 50.8,42.672 52.324,42.672 53.848,42.672 55.372,42.672 50.8,44.196 52.324,44.196 53.848,44.196 55.372,44.196 50.8,45.72 52.324,45.72 53.848,45.72 55.372,45.72 50.8,47.244 52.324,47.244 53.848,47.244 55.372,47.244 50.8,48.768 52.324,48.768 53.848,48.768 55.372,48.768
M1_2: C33.2 J8.2 Q4.1 Q7.1 R40.1 | length 5
  Bottom Layer w0.6: J8.2 J8.2 R40.1 C33.2
NetC1_1: C1.1 U1.8 | length 3.9
  Top Layer w0.6: C1.1 36.195,32.944 36.805,32.334 U1.8
NetC1_2: C1.2 D1.2 L1.1 U1.1 | length 1
  Top Layer w0.6: L1.1@33.785,24.409 L1.1@33.807,24.432 ; U1.1 U1.1@36.805,26.568
NetC3_1: C3.1 C7.1 F1.2 R1.2 U1.7 | length 26.6
  Top Layer w0.6: v2(35.789,22.911) 35.789,21.869 R1.2 ; U1.7 v2(38.075,33.934) C7.1 39.079,37.581 C3.1 F1.2
  Bottom Layer w0.6: v2(35.789,22.911) 37.465,24.587 37.465,28.946 38.075,29.556 v2(38.075,33.934)
NetC8_2: C8.2 C9.2 C12.1 FB1.1 U2.0 U2.2 | length 16.9
  Top Layer w0.6: U2.0 U2.2 21.438,38.913 21.996,38.354 C9.2 FB1.1
NetC11_1: C11.1 U1.3 | length 2.8
  Top Layer w0.203: C11.1@39.345,22.758 U1.3
NetC11_2: C11.2 R5.2 | length 2.2
  Top Layer w0.203: C11.2@39.395,20.422 R5.2@41.605,20.422
NetC18_1: C18.1 R8.1 U5.7 | length 8
  Top Layer w0.203: U5.7 3.988,40.894 C18.1 R8.1
NetC18_2: C18.2 R20.1 U5.8 | length 7.6
  Top Layer w0.203: U5.8 C18.2 R20.1
NetC19_1: C19.1 R9.1 U5.9 | length 7.3
  Top Layer w0.203: R9.1@2.718,23.444 2.718,25.603 U5.9
NetC19_2: C19.2 R21.1 U5.10 | length 8.1
  Top Layer w0.203: U5.10 3.988,26.645 C19.2 R21.1
NetC21_2: C21.2 FB2.1 U9.1 | length 5.9
  Top Layer w0.6: C21.2 56.109,15.316 56.363,15.062 FB2.1 58.572,15.088 U9.1
NetD5_2: D5.2 Q2.1 R13.2 | length 5.4
  Top Layer w0.6: Q2.1 52.602,12.991 54.319,12.991 54.331,12.979 R13.2@54.331,10.49
NetD8_1: D8.1 R24.2 U7.4 U7.5 U8.2 U8.4 | length 32.3
  Top Layer w0.203: D8.1 v1(60.376,17.831)
  Bottom Layer w0.203: U7.4 U7.5 52.476,29.82 53.264,30.607 58.547,30.607 59.258,29.896 U8.2 59.258,26.619 ; v1(60.376,17.831) 59.842,17.297 R24.2 57.048,18.186 57.048,24.409 59.258,26.619 ; U8.4 61.798,26.619 61.443,26.264 59.614,26.264 59.258,26.619
NetD8_2: D8.2 U9.2 | length 2.8
  Top Layer w0.6: U9.2 58.572,18.745 D8.2
NetD10_1: D10.1 R30.2 U11.3 | length 4.5
  Bottom Layer w0.203: U11.3 R30.2 D10.1
NetD10_2: D10.2 R12.1 R29.1 | length 4.5
  Bottom Layer w0.203: R12.1 48.819,2.464 D10.2 R29.1
NetD11_1: D11.1 Q6.2 R31.2 | length 3.9
  Top Layer w0.6: D11.1@55.855,8.407 Q6.2 R31.2
NetD12_1: D12.1 R34.2 R36.1 U8.1 U12.3 | length 30.9
  Top Layer w0.203: v1(49.53,11.303) 49.53,12.7 49.428,12.802 49.428,24.689 50.317,25.578 57.15,25.578 v1(57.988,26.416)
  Bottom Layer w0.203: U12.3 R34.2 D12.1 R36.1 ; v1(57.988,26.416) U8.1
NetD12_2: D12.2 D13.2 R23.2 R24.1 | length 11.6
  Bottom Layer w0.203: D12.2 53.365,13.462 53.924,14.021 55.626,14.021 55.905,14.3 55.905,17.043 R24.1 D13.2 R23.2
NetD13_1: D13.1 R39.2 R43.1 U8.5 U13.3 | length 39.3
  Bottom Layer w0.203: R43.1 D13.1 R39.2 U13.3 45.314,29.362 47.117,31.166 61.697,31.166 63.068,29.794 U8.5
NetF2_1: F2.1 Q2.2 | length 4.8
  Top Layer w0.6: 45.264,10.491 Q2.2@45.264,15.291
NetLED1_1: LED1.1 R19.1 | length 2.3
  Top Layer w0.203: LED1.1@15.418,10.48 R19.1
NetQ1_2: Q1.2 U5.2 | length 12.6
  Top Layer w0.203: U5.2 10.338,38.964 11.151,39.776 14.961,39.776 16.688,41.504 Q1.2
NetQ3_1: Q3.1 R29.2 | length 3.1
  Bottom Layer w0.203: R29.2 Q3.1
NetQ3_3: Q3.3 R26.1 R27.2 | length 4.9
  Bottom Layer w0.203: Q3.3 R27.2 R26.1
NetQ9_1: Q9.1 R36.2 | length 3.2
  Bottom Layer w0.203: R36.2 Q9.1
NetQ9_3: Q9.3 R33.1 R35.2 | length 4.8
  Bottom Layer w0.203: Q9.3 R35.2 R33.1
NetQ10_1: Q10.1 R43.2 | length 3.2
  Bottom Layer w0.203: R43.2 Q10.1
NetQ10_3: Q10.3 R41.1 R42.2 | length 4.9
  Bottom Layer w0.203: Q10.3 R42.2 R41.1
NetR1_1: R1.1 U1.2 | length 3.2
  Top Layer w0.203: R1.1 38.075,23.546 U1.2
NetR2_2: R2.2 R3.2 U1.4 | length 4.6
  Top Layer w0.6: U1.4 R3.2 R2.2
NetR4_2: R4.2 U1.6 | length 4.3
  Top Layer w0.6: U1.6 39.345,32.944 39.903,33.503 R4.2
NetR11_1: R11.1 U4.2 U4.3 | length 7.4
  Bottom Layer w0.203: U4.3 U4.2 14.249,32.944 14.478,33.172 16.561,33.172 17.221,32.512 R11.1
NetR12_2: R12.2 U7.6 | length 44.9
  Top Layer w0.203: v1(53.746,29.972) v1(53.746,32.106)
  Bottom Layer w0.203: R12.2 43.79,2.464 41.758,4.496 41.758,16.002 44.729,18.974 44.729,29.693 47.142,32.106 v1(53.746,32.106) ; U7.6 v1(53.746,29.972)
NetR17_1: R17.1 R18.1 U5.4 | length 10.4
  Top Layer w0.203: U5.4 7.798,39.345 9.169,40.716 11.176,40.716 R17.1 R18.1
NetR26_2: R26.2 U10.2 U10.4 | length 36.7
  Top Layer w0.203: v1@62.662,7.188 62.662,19.126 72.415,28.88 v1(72.415,30.048)
  Bottom Layer w0.203: R26.2 61.265,5.664 62.382,5.664 62.662,5.944 v1(62.662,6.934) ; U10.2 69.875,26.899 70.079,26.695 72.161,26.695 72.415,26.949 U10.4 v1(72.415,30.048)
NetR28_2: R28.2 U11.1 | length 17.4
  Bottom Layer w0.203: U11.1 39.37,4.699 41.123,6.452 41.123,17.145 43.663,19.685 R28.2
NetR32_2: R32.2 U12.1 | length 11.7
  Bottom Layer w0.203: U12.1 39.421,9.728 40.513,10.82 40.513,17.272 41.885,18.644 R32.2
NetR33_2: R33.2 U10.1 | length 24.9
  Top Layer w0.203: v1(61.239,11.227) 61.976,11.963 61.976,19.279 68.605,25.908 v1(68.605,30.048)
  Bottom Layer w0.203: R33.2 v1(61.239,11.227) ; U10.1 v1(68.605,30.048)
NetR37_2: R37.2 U13.1 | length 6
  Bottom Layer w0.203: U13.1 39.472,14.757 40.107,15.392 R37.2
NetR41_2: R41.2 U10.5 | length 21.2
  Top Layer w0.203: v1(63.322,14.935) 63.322,18.771 71.374,26.822 v1(73.685,26.822)
  Bottom Layer w0.203: R41.2 v1(63.322,14.935) ; v1(73.685,26.822) U10.5
NetR44_1: R44.1 U6.10 U14.1 | length 26
  Top Layer w0.203: v1(26.797,28.931) 26.797,21.692 28.372,20.117 v1(28.372,16.688)
  Bottom Layer w0.203: v1(26.797,28.931) 26.797,32.207 27.254,32.664 U14.1 R44.1 ; v1(28.372,16.688) 28.372,15.164 29.461,14.074 U6.10
NetR44_2: R44.2 R45.1 U14.2 | length 7.8
  Bottom Layer w0.203: U14.2 33.223,31.394 R44.2 R45.1
NetR46_1: R46.1 U14.3 | length 3.2
  Bottom Layer w0.203: U14.3 R46.1
NRST: C15.2 R15.1 U6.7 | length 4
  Top Layer w0.203: R15.1 29.286,14.834 v1(29.286,15.824) 29.286,16.815 C15.2
  Bottom Layer w0.203: v1(29.286,15.824) 29.536,15.574 U6.7
OSC1: C23.2 U6.5 Y1.2 | length 7.7
  Top Layer w0.203: Y1.2 35.687,17.45 C23.2
  Bottom Layer w0.203: U6.5 31.814,16.574 32.69,17.45 Y1.2
OSC2: C24.2 U6.6 Y1.1 | length 10.1
  Top Layer w0.203: Y1.1 36.017,12.37 C24.2
  Bottom Layer w0.203: U6.6 32.592,16.074 33.858,14.808 Y1.1
REFER: C22.2 C31.1 D7.1 Q6.3 U10.7 | length 43.4
  Top Layer w0.6: D7.1@56.363,4.369 54.331,4.369 54.331,6.299 54.534,6.502 Q6.3 58.217,5.944 63.297,5.944 64.237,6.883 64.237,18.415 71.476,25.654 v2(76.225,25.654)
  Bottom Layer w0.6: 76.225,26.06 U10.7
RS485_A: D3.2 J1.1 J2.1 R10.2 U4.6 | length 53.8
  Bottom Layer w0.203: U4.6 12.979,47.32 15.138,49.479 24.333,49.479 26.441,51.587 R10.2 26.441,55.347 J2.1 27,58.242 45.136,58.242 J1.1
RS485_B: D2.1 J1.2 J2.2 R10.1 U4.7 | length 57.6
  Top Layer w0.203: J2.2 31.953,58.115 50.114,58.115 51.714,56.515 J1.2
  Bottom Layer w0.203: U4.7 14.249,47.65 15.469,48.87 28.054,48.87 D2.1 28.727,51.931 R10.1@28.727,53.442 ; R10.1@28.727,53.111 R10.1@28.727,53.442 ; J2.2 28.727,54.889 R10.1 R10.1@28.727,53.442
SENSOR: Q7.3 Q8.3 R46.2 R48.2 | length 45
  Top Layer w0.203: Q7.3@65.507,34.375 Q7.3
  Top Layer w4: 60.706,39.37 60.833,39.243 61.468,38.608 61.785,38.291 v2(62.431,37.645) 62.738,37.338 63.055,37.02 v2(63.512,36.564) 64.008,36.068 64.325,35.75 v2(64.516,35.56) 65.024,35.052
  Bottom Layer w0.203: R46.2 35.814,31.445 35.814,34.915 39.888,38.989 R48.2@42.848,38.989 ; R48.2@42.848,38.479 R48.2@42.848,38.989 ; R48.2 R48.2@42.848,38.989
  Bottom Layer w4: 44.018,38.989 60.96,38.989 ; v2@61.485,38.591 61.468,38.608 v2@61.366,38.608 ; v2@63.246,36.83 v2(63.512,36.564) ; v2@63.754,36.322 64.008,36.068 ; v2@64.262,35.814 64.008,36.068 ; 60.96,38.989 61.341,38.608 v2@61.366,38.608 ; 60.96,38.989 v2@61.366,38.608 ; v2@61.366,38.608 61.424,38.553 61.721,38.275 62.413,37.624 62.753,37.305 63.029,37.045 63.055,37.02 v2(63.512,36.564) ; v2(63.512,36.564) 64.008,36.068
  other v2: 63.5,34.925 62.23,36.195 64.77,36.83 60.96,37.465 63.5,38.1 61.595,38.735 61.595,40.005
SENSOR_A+: J4.1 R20.2 | length 11.2
  Top Layer w0.203: R20.2 5.486,49.378 5.486,53.032 J4.1
SENSOR_A-: J4.2 R8.2 | length 12.6
  Top Layer w0.203: R8.2 5.944,47.549 5.944,50.723 10.847,55.626 J4.2
SENSOR_B+: R21.2
SENSOR_B-: R9.2
SENSOR_DOUT: U5.12 U6.18 | length 34.4
  Top Layer w0.203: U5.12 6.528,28.143 7.036,27.635 8.204,27.635 9.728,26.111 9.728,22.123 10.795,21.057 21.412,21.057 25.476,16.993 v1(25.476,14.275)
  Bottom Layer w0.203: v1(25.476,14.275) 25.476,13.818 26.59,12.704 U6.18
SENSOR_E+: C16.2 J4.4 Q1.1 R17.2 U5.3 | length 28.5
  Top Layer w0.203: U5.3 9.068,39.141 10.185,40.259 13.005,40.259 R17.2 Q1.1 13.843,46.228 C16.2 12.37,49.229 18.767,55.626 J4.4
SENSOR_SCK: U5.11 U6.19 | length 35.1
  Top Layer w0.203: U5.11 5.258,28.55 6.655,27.153 7.925,27.153 9.246,25.832 9.246,21.793 10.414,20.625 21.26,20.625 24.867,17.018 v1(24.867,13.462)
  Bottom Layer w0.203: v1(24.867,13.462) 25.197,13.462 26.09,12.569 U6.19
SW1: S1.1 U6.46 | length 35.9
  Top Layer w0.203: S1.1 v1(3.302,9.423)
  Bottom Layer w0.203: v1(3.302,9.423) 3.302,12.062 15.07,23.83 25.598,23.83 28.09,21.339 U6.46
SW2: S1.2 U6.45 | length 33.9
  Top Layer w0.203: S1.2 v1(4.572,9.423)
  Bottom Layer w0.203: v1@4.572,9.449 4.572,12.595 15.327,23.351 25.367,23.351 27.59,21.127 U6.45
SW3: S1.3 U6.41 | length 30.3
  Top Layer w0.203: S1.3 v1(5.842,9.423)
  Bottom Layer w0.203: v1(5.842,9.423) 5.842,13.12 15.227,22.504 24.257,22.504 25.59,21.172 U6.41
SW4: S1.4 U6.40 | length 28.5
  Top Layer w0.203: S1.4 v1(7.112,9.423)
  Bottom Layer w0.203: v1(7.112,9.423) 7.112,13.682 15.502,22.073 24.105,22.073 25.09,21.087 U6.40
SW5: S1.5 U6.39 | length 26.6
  Top Layer w0.203: S1.5 v1(8.382,9.423)
  Bottom Layer w0.203: v1(8.382,9.423) 8.382,14.245 15.777,21.641 23.952,21.641 24.59,21.003 U6.39
SW6: S1.6 U6.38 | length 24.8
  Top Layer w0.203: S1.6 v1(9.652,9.423)
  Bottom Layer w0.203: 9.65,13.159 9.652,13.16 ; v1@9.652,9.449 9.652,13.16 ; U6.38 24.09,20.906 23.787,21.209 16.053,21.209 9.652,14.808 9.652,13.16
SW7: S1.7 U6.33 | length 17.2
  Top Layer w0.203: S1.7 v1(10.922,9.423)
  Bottom Layer w0.203: v1(10.922,9.423) 10.922,12.09 15.906,17.074 U6.33
SW8: S1.8 U6.32 | length 17.1
  Top Layer w0.203: S1.8 v1(12.192,9.423)
  Bottom Layer w0.203: 12.192,10.414 v1(12.192,9.423) 12.192,12.751 16.015,16.574 U6.32
SWCLK: J5.3 U6.37 | length 28.9
  Top Layer w0.203: J5.3@11.633,1.549 13.437,3.353 13.437,18.517 15.011,20.091 20.777,20.091 v1(21.26,19.609)
  Bottom Layer w0.203: v1(21.26,19.609) 21.725,20.074 U6.37
SWDIO: J5.2 U6.34 | length 23.4
  Top Layer w0.203: J5.2@14.173,1.549 v1(14.173,16.612)
  Bottom Layer w0.203: v1(14.173,16.612) 15.136,17.574 U6.34
SWITCH_21: Q5.2 U10.3 | length 23
  Top Layer w0.203: Q5.2 62.518,41.427 66.827,41.427 68.047,40.208 68.047,33.35 v1(71.145,30.251)
  Bottom Layer w0.203: U10.3 v1(71.145,30.251)
SWITCH_22: Q8.2 U8.3 | length 7.2
  Top Layer w0.203: Q8.2 59.815,30.711 v1(60.528,29.997)
  Bottom Layer w0.203: U8.3 v1(60.528,29.997)
SWITCH_23: Q4.2 U10.6 | length 25.9
  Top Layer w0.203: Q4.2 68.504,46.448 68.504,33.909 71.704,30.709 v1(74.955,30.709)
  Bottom Layer w0.203: U10.6 v1(74.955,30.709)
SWITCH_24: Q7.2 U8.6 | length 13.1
  Top Layer w0.203: v1@66.195,38.077 Q7.2
  Bottom Layer w0.203: U8.6 64.338,29.997 67.183,32.842 67.183,37.084 v1(66.192,38.075)
UART1_RX: J6.1 U6.31 | length 24
  Top Layer w0.203: v1(23.419,16.332) 24.232,15.519 24.232,8.407 28.829,3.81 34.29,3.81 J6.1
  Bottom Layer w0.203: U6.31 23.161,16.074 v1(23.419,16.332)
UART1_TX: J6.2 U6.30 | length 20.8
  Top Layer w0.203: v1(23.571,15.164) 23.571,8.433 28.702,3.302 32.258,3.302 J6.2
  Bottom Layer w0.203: U6.30 23.161,15.574 v1(23.571,15.164)
VBG: C17.1 U5.6 | length 6.1
  Top Layer w0.203: U5.6 5.258,38.252 7.544,40.538 C17.1
VDD: C21.1 C30.1 D9.2 Q2.3 U7.14 U8.14 U9.3 U11.4 U12.4 U13.4 | length 45.7
  Top Layer w0.6: v2(50.216,13.716) 50.216,16.043 51.764,17.591 ; C30.1@51.764,20.607 51.764,17.591 ; D9.2 57.429,23.393 v1(57.988,23.952) ; U9.3@56.529,17.591 51.764,17.591
  Bottom Layer w0.4: U11.4 44.094,4.699 43.739,5.055 43.739,9.195 44.272,9.728 ; U12.4 44.272,9.728 ; v2(50.216,13.716) 46.787,13.716 45.745,14.757 44.196,14.757 43.764,14.326 43.764,10.236 44.272,9.728
  Bottom Layer w0.6: U7.14 47.396,24.028 48.133,24.765 50.241,24.765 v2(50.952,24.054) ; U8.14 v1(57.988,23.952)
pads on no net: U3.1 U3.2 U3.3 U3.7 U5.13 U6.2 U6.3 U6.4 U6.17 U6.25 U6.26 U6.27 U6.28 U7.1 U7.2 U7.3 U7.8 U7.9 U7.10 U7.11 U7.12 U7.13 U8.8 U8.9 U8.10 U8.11 U8.12 U8.13 U10.8 U10.9 U10.10 U10.11 U10.12 U10.13 U14.5 U14.6 U14.7

## Polygon pours and split planes (outlines as drawn)
GND on Top Layer "Top Layer-No Net" (solid, remove dead copper, pour order 1000): 0,60 0,0 80,0 80,60
GND on Bottom Layer "Top Layer-No Net" (solid, remove dead copper, pour order 1001): 0,60 0,0 80,0 80,60

## Keep-outs
Keep-Out Layer:
  the board outline again, w0.127

## Other copper
Top Layer:
  rectangle net GND: 54.483,54.737 59.309,58.293
  rectangle net GND: 27.737,31.801 29.286,38.176
  rectangle net GND: 26.645,34.595 35.23,39.091
  rectangle net GND: 32.639,36.83 36.5,57.76
  rectangle net NetC1_2: 33.376,24.333 37.084,26.848
  rectangle net M1_1: 49.682,34.188 56.896,49.657
  rectangle net M1_2: 69.113,34.112 76.276,49.708
  rectangle net GND: 44.425,19.228 48.006,26.264
  rectangle net VDD: 50.521,16.866 52.959,24.486
  pour cut-out: 27.33,28.626 27.381,28.677 35.306,28.677 35.306,23.647 35.281,23.673 35.255,23.114 27.33,23.114
  region net NetC1_2: 35.306,23.647 33.325,23.647 33.325,27.559 30.81,30.074 30.81,31.445 34.925,31.445 35.306,31.064
  region net M1_2: 70.764,56.49 70.764,53.137 69.113,51.486 69.113,47.777 76.276,47.777 76.276,51.511 73.254,54.534 73.254,56.49 72.619,57.125 71.577,57.125
Bottom Layer:
  rectangle net GND: 54.483,54.864 59.309,58.293
  rectangle net +24V: 38.481,50.19 63.602,54.178
  rectangle net +24V: 60.655,50.216 63.602,58.268
  rectangle net +24V: 38.456,42.647 43.967,57.734
  rectangle net GND: 32.664,37.313 37.211,57.785
  region net M1_1: 67.285,56.921 66.472,56.109 66.472,49.784 66.065,49.479 63.957,49.505 49.733,49.505 49.733,42.113 49.708,42.088 49.759,42.037 63.576,42.037 69.367,47.828 69.367,56.134 68.58,56.921

## Silkscreen, mask and mechanical layers (free items; w line width, h text height)
Top Overlay:
  text "+24V" at 38.989,52.451 h1
  text "485A" at 23.622,52.324 h1
  text "485B" at 28.575,52.324 h1
  text "GND" at 34.29,52.324 h1
  text "485A" at 44.958,52.324 h1
  text "485B" at 50.038,52.324 h1
  text "GND" at 55.88,52.324 h1
  text "+24V" at 60.071,52.324 h1
  text "A+" at 5.969,48.87 h1
  text "A-" at 9.982,48.87 h1
  text "E-" at 13.995,48.87 h1
  text "E+" at 18.009,48.87 h1
  text "YarnControl_Driver_v1.1" at 53.061,27.864 h1
  text "2018.10.31" at 60.579,26.289 h1
  text "GND" at 7.747,4.064 h1
  text "CLK" at 10.795,4.064 h1
  text "IO" at 13.843,4.064 h1
  text "3.3" at 15.875,4.064 h1
  text "RX" at 19.05,4.064 h1
  text "TX" at 21.463,4.064 h1
  text "GND" at 23.622,4.064 h1
  text "3.3" at 26.67,4.064 h1
  text "GND" at 29.845,4.064 h1
  text "TX" at 32.893,4.064 h1
  text "RX" at 35.179,4.064 h1
Top Solder:
  lines w3: 59.815,39.638 60.565,39.638 65.14,35.063 66.195,35.063 ; 59.815,50.802 59.815,48.796 64.454,44.157 66.195,44.157

## Dimensions
0,0 to 80,0 on Top Overlay
0,0 to 0,60 on Top Overlay

## Text inside footprints (layer, text, board x,y; h text height)
C34: Top Overlay "+" at 44.094,49.784 h1 r180; Top Overlay "+" at 41.123,49.454 h1 r180; Bottom Overlay "+" at 42.291,47.371 h1 r180
S1: Top Overlay "8" at 11.811,12.649 h1; Top Overlay "7" at 10.541,12.649 h1; Top Overlay "6" at 9.271,12.649 h1; Top Overlay "5" at 8.001,12.649 h1; Top Overlay "4" at 6.731,12.649 h1; Top Overlay "3" at 5.461,12.649 h1; Top Overlay "2" at 4.191,12.649 h1; Top Overlay "1" at 3.175,12.649 h1